# Altium PCB CS4334_V4.PcbDoc
Units mm, origin at the board's own origin, x right, y up, seen from the top; angles counter-clockwise.
Board outline 88.9 x 50.8 mm, 2 copper layers (Top Layer, Bottom Layer); 17 components, 12 nets, 65 pads, 4 vias.
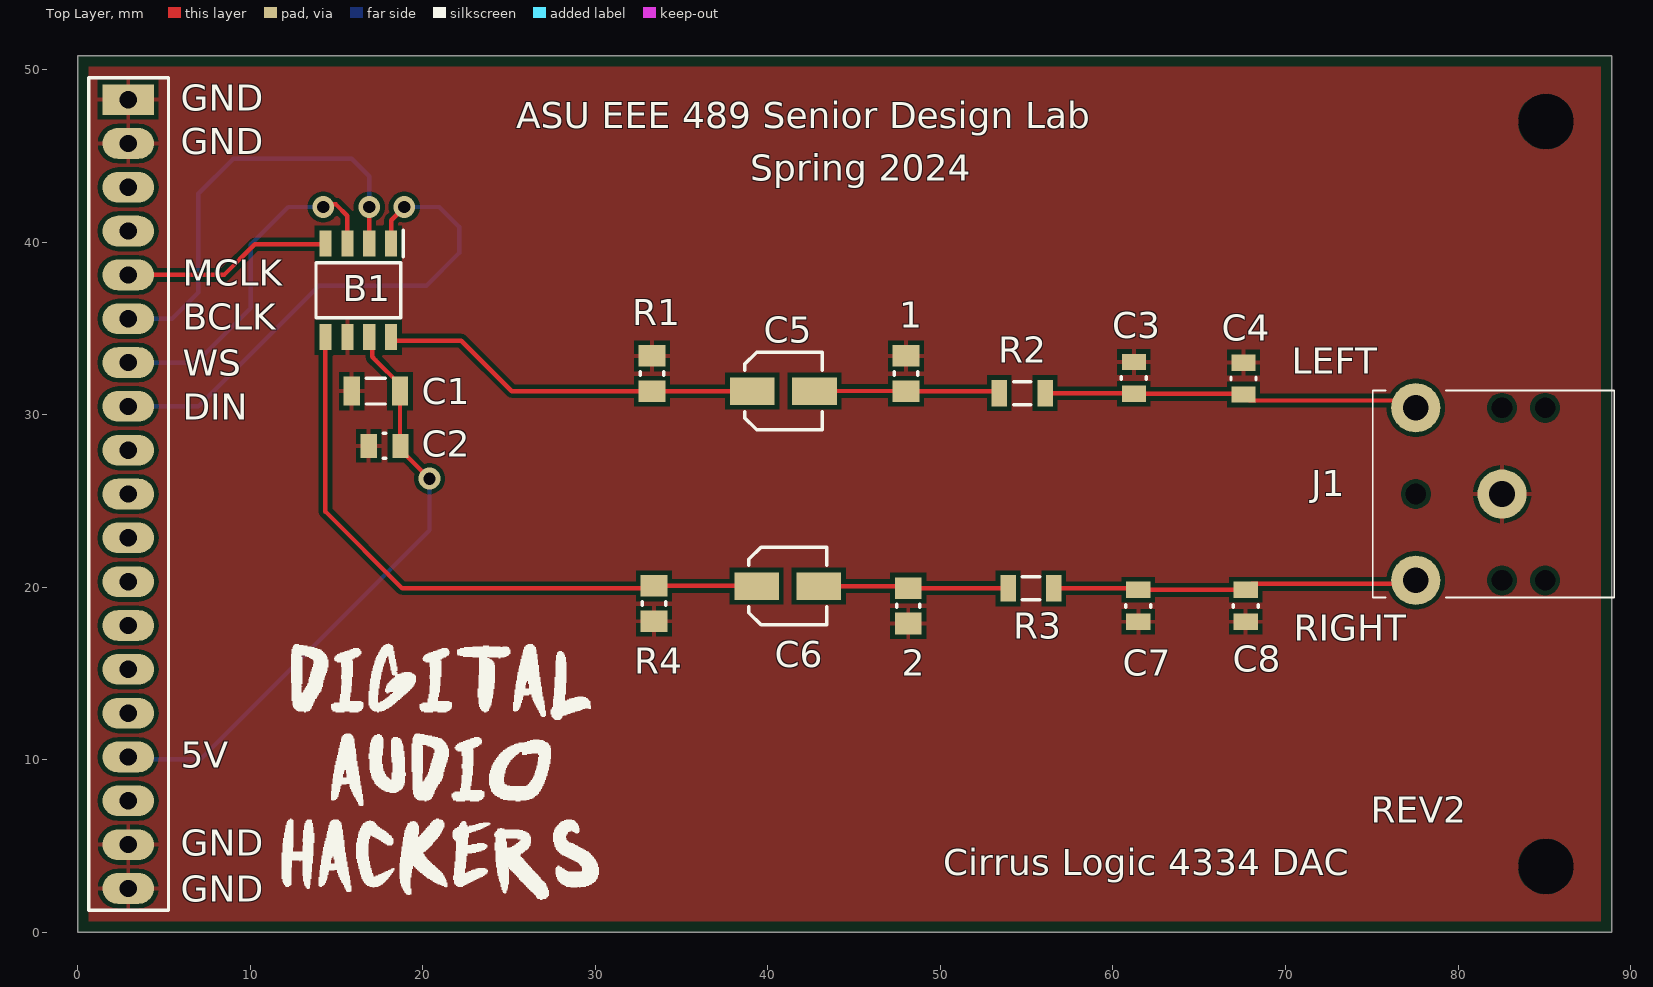
[diagram p0: Top Layer view]
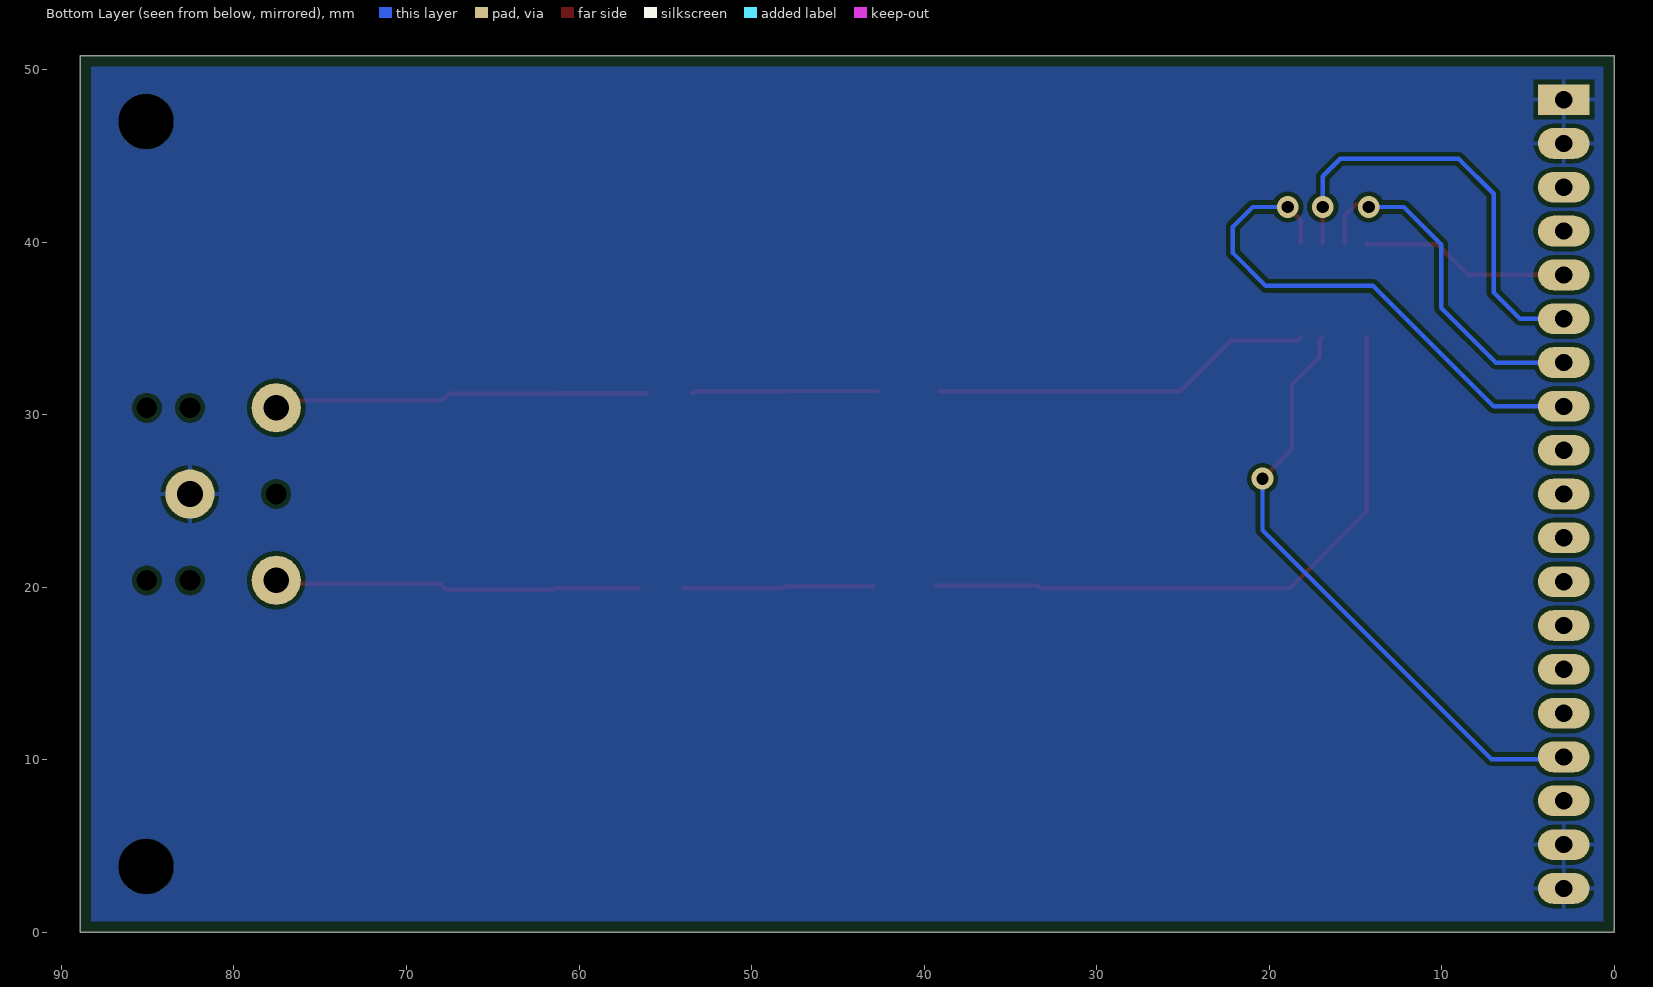
[diagram p1: Bottom Layer view, seen from below]

## Layer stack, top to bottom
Top Solder: solder mask 0.0102, Solder Resist, Dk 3.5
Top Layer: signal copper 0.0356
Dielectric 1: dielectric 0.32, FR-4, Dk 4.8
Bottom Layer: signal copper 0.0356
Bottom Solder: solder mask 0.0102, Solder Resist, Dk 3.5

## Board outline
0,0 88.9,0 88.9,50.8 0,50.8

## Design rules (kind name [scope] priority, off if disabled: settings)
Clearance [All] p1: gap=0.254 ignorepadtopadclearanceinfootprint=FALSE
HoleSize [All] p1: absolutevalues=TRUE maxlimit=4 minlimit=0.025 maxpercent=80.000 minpercent=20.000
MinimumSolderMaskSliver [All] p1: minsoldermaskwidth=0.245
PolygonConnect [All] p1: connectstyle=Relief reliefconductorwidth=0.254 reliefentries=4 polygonreliefangle="90 Angle" airgapwidth=0.254
RoutingVias [All] p1: holewidth=0.711 width=1.27 viastyle="Through Hole" minholewidth=0.711 minwidth=1.27 maxholewidth=0.711 maxwidth=1.27
SilkToSolderMaskClearance [IsPad] p1: minsilkscreentomaskgap=0.19 clearancetoexposedcopper=TRUE
SolderMaskExpansion [All] p1: expansion=0.102 istentingtop=FALSE
Width [All] p1: maxlimit=0.254 minlimit=0.254 preferedwidth=0.254
27 further rules are at their usual default settings.

## Components (designator, comment, footprint, x,y, rotation, side; value= is the part's Value field where it differs from the comment)
1 "CRCW080510K0FKEC" RESC2013X50X30ML20T20 48.006,32.385 r90 top
2 "CRCW080510K0FKEC" RESC2013X50X30ML20T20 48.133,18.923 r270 top
B1 "CS4334-KSZ" SOIC127P600X175-8N 16.256,37.211 r270 top
C1 "CAP 100nF 16V 1206(3216)" CAPC1206(3216)100_L 17.272,31.369 r0 top value=100nF
C2 "CC0805KKX7R7BB105" FP-CC0805-0_85-MFG 17.78,28.194 r180 top value="1 uF"
C3 "CC0805KRX7R9BB152" FP-CC0805-0_85-MFG 61.214,32.131 r90 top value="1.5 nF"
C4 "CC0805KRX7R9BB152" FP-CC0805-0_85-MFG 67.564,32.095 r90 top value="1.5 nF"
C5 "UUD1H3R3MCL1GS" NIC-CAPA2-4X5.8_V 40.894,31.369 r0 top
C6 "UUD1H3R3MCL1GS" NIC-CAPA2-4X5.8_V 41.148,20.066 r0 top
C7 "CC0805KRX7R9BB152" FP-CC0805-0_85-MFG 61.468,18.923 r270 top value="1.5 nF"
C8 "CC0805KRX7R9BB152" FP-CC0805-0_85-MFG 67.691,18.923 r270 top value="1.5 nF"
DC1 "DAUGHER_CARD" Daughter_Card 2.921,48.26 r0 top
J1 "SJ1-3523NG" SJ13523NG 82.55,25.4 r180 top
R1 "CRCW0805267KFKEA" RESC2013X50X30ML20T20 33.274,32.385 r270 top
R2 "ERJ8ENF5600V" RESC3216X70X50LL05T20 54.737,31.242 r0 top
R3 "ERJ8ENF5600V" RESC3216X70X50LL05T20 55.245,19.939 r0 top
R4 "CRCW0805267KFKEA" RESC2013X50X30ML20T20 33.401,19.05 r90 top

## Footprints (in the part's own frame and the unit in brackets; to place one, negate y for a bottom-side part, rotate by r counter-clockwise, add the part's x,y. Pads: shape width x height; smd on the part's side, far side on the other; paste and mask are expansions set on the pad)
CAPC1206(3216)100_L [mm] "Chip Capacitor, Body 3.2x1.6mm, Height 1mm, IPC High Density"
  rect 0.95x1.7 smd: 1(-1.4,0) 2(1.4,0)
  silkscreen extent -0.55,-0.75 0.55,0.75, body extent -1.7,-0.9 1.7,0.9, height 1
Daughter_Card [mm]
  rect 3x1.78 hole 1: 1(0,0)
  oval 3x1.78 hole 1: 2(0,-2.54) 3(0,-5.08) 4(0,-7.62) 5(0,-10.16) 6(0,-12.7) 7(0,-15.24) 8(0,-17.78) 9(0,-20.32) 10(0,-22.86) 11(0,-25.4) 12(0,-27.94) 13(0,-30.48) 14(0,-33.02) 15(0,-35.56) 16(0,-38.1) 17(0,-40.64) 18(0,-43.18) 19(0,-45.72)
  silkscreen extent -2.29,-46.99 2.33,1.27, body extent -2.92,-46.99 2.92,1.27, height 7.49
FP-CC0805-0_85-MFG [mm]
  rect 0.95x1.4 smd paste+0 mask+0: 1(-0.925,0) 2(0.925,0)
  silkscreen extent -0.08,-0.72 0.08,0.72, body extent -1.6,-1.05 1.6,1.05, height 0.25
NIC-CAPA2-4X5.8_V [mm] "Aluminum Electrolytic Capacitor, Diameter 4mm, Height 6.1mm, Pitch 3.6mm"
  rect 2.6x1.6 smd: 1(-1.8,0) 2(1.8,0)
  silkscreen extent -2.25,-2.25 2.25,2.25, body extent -2,-1.98 2,2, height 6.1
RESC2013X50X30ML20T20 [mm] "Chip Resistor, 2-Leads, Body 2.00x1.25mm, IPC Low Density"
  rect 1.25x1.55 smd: 1(-1.025,0) 2(1.025,0)
  silkscreen extent -0.1,-0.67 0.1,0.67, body extent -1.1,-0.72 1.1,0.72, height 0.5
RESC3216X70X50LL05T20 [mm] "Chip Resistor, 2-Leads, Body 3.20x1.60mm, IPC High Density"
  rect 0.9x1.55 smd: 1(-1.325,0) 2(1.325,0)
  silkscreen extent -0.5,-0.67 0.5,0.67, body extent -1.63,-0.82 1.62,0.82, height 0.7
SJ13523NG [mm]
  round 2.85 hole 1.5: 1(0,0) 2(5,-5) 3(5,5)
  round 0.6 hole 1.2 unplated: MH1(-2.5,5) MH2(0,5) MH3(-2.5,-5) MH4(0,-5) MH5(5,0)
  silkscreen extent -10.3,-6 7.5,6
SOIC127P600X175-8N [mm]
  rect 1.525x0.7 smd: 1(-2.712,1.905) 2(-2.712,0.635) 3(-2.712,-0.635) 4(-2.712,-1.905) 5(2.712,-1.905) 6(2.712,-0.635) 7(2.712,0.635) 8(2.712,1.905)
  silkscreen extent -3.47,-2.45 1.6,2.61

## Part data
1 2: library part CMP-1013-00623-2, Manufacturer="Vishay Dale", Part Number=CRCW080510K0FKEC
B1: "CS4334-KSZ, Audio DAC Dual 24 bit-, 96ksps +/-5%FSR Serial, 8-Pin SOIC", Manufacturer_Name="Cirrus Logic", Mouser Part Number=777-CS4334-KSZ, Datasheet Link=https://d3uzseaevmutz1.cloudfront.net/pubs/proDatasheet/CS4334-5-8-9_F7.pdf, Geometry.Height=1.75mm, Manufacturer_Part_Number=CS4334-KSZ, Mouser Price/Stock=https://www.mouser.co.uk/ProductDetail/Cirrus-Logic/CS4334-KSZ?qs=bUPhaerQQeGFS7Qn8B%252B25A%3D%3D
C1: library part CMP-1037-04182-1, "CAP 100nF 16V ±10% 1206 (3216 Metric) Thickness 1mm SMD", Case-EIA=1206, Case-Metric=3216, Rated Voltage="16 V", Tolerance=Â±10%, Max Thickness="1 mm", Technology=SMT
C2: library part CMP-03422-000001-1, "CAP CER 1UF 16V X7R 0805", Capacitance="1 uF", Manufacturer=Yageo, Package=CC0805-0.85, Temperature="-30°C to +85°C", Temperature Characteristic=X7R, Temperature Range High=+85°C, Temperature Range Low=-30°C, Tolerance=0.1, Voltage Rating="16 V", Automotive=No, Category=Cap, ComponentLink2Description=Datasheet, ComponentLink2URL=http://www.yageo.com/documents/recent/UPY-GPHC_Y5V_6.3V-to-50V_8.pdf, Device Class L1="Passive Components", Device Class L2=Capacitors, Device Class L3="Ceramic Capacitors", Digikey Description="CAP CER 1UF 16V X7R 0805", Footprint Url=http://www.yageo.com/exep/pages/download/literatures/UPY-C_GEN_24.pdf, Height=0.95mm, Ipc Land Pattern Name=CAPC200125X85, Lead Free=Yes, Manufacturer Part Number=CC0805KKX7R7BB105, Material=Ceramic, Mouser Description="Multilayer Ceramic Capacitors MLCC - SMD/SMT 1.0uF 16V X7R 10%", Octopart=https://octopart.com/cc0805kkx7r7bb105-yageo-8376555, RoHS=TRUE
C3 C4 C7 C8: library part CMP-1036-03122-2, "CAP CER 1500PF 50V X7R 0805", Capacitance="1.5 nF", Manufacturer=Yageo, Package=CC0805-0.85, Temperature="-30°C to +85°C", Temperature Characteristic=X7R, Temperature Range High=+85°C, Temperature Range Low=-30°C, Tolerance=0.1, Voltage Rating="50 V", Automotive=No, Category=Cap, ComponentLink2Description=Datasheet, ComponentLink2URL=http://www.yageo.com/documents/recent/UPY-GPHC_Y5V_6.3V-to-50V_8.pdf, Device Class L1="Passive Components", Device Class L2=Capacitors, Device Class L3="Ceramic Capacitors", Digikey Description="CAP CER 1500PF 50V X7R 0805", Footprint Url=http://www.yageo.com/exep/pages/download/literatures/UPY-C_GEN_24.pdf, Height=0.95mm, Ipc Land Pattern Name=CAPC200125X85, Lead Free=Yes, Manufacturer Part Number=CC0805KRX7R9BB152, Material=Ceramic, Mouser Description="Multilayer Ceramic Capacitors MLCC - SMD/SMT 1.5nF 50V X7R 10%", Octopart=https://octopart.com/cc0805krx7r9bb152-yageo-39467749, RoHS=TRUE
C5 C6: library part CMP-0687-00014-1, "Aluminum Electrolytic Capacitor, UD Series, Low Impedance, 3.3 uF, 50 V, + / - 20%, -55 to 105 degC, Chip Type, 4 x 5.8 mm D x L, Pb-Free, Reel", Manufacturer=Nichicon, Rated Capacitance="3.3 uF", Rated Ripple Current (at 100kHz)="30 mA", Rated Voltage="50 V", Tolerance Rated Capacitance="-20 to 20%", ComponentLink1Description="Manufacturer URL", ComponentLink1URL=http://www.nichicon.co.jp/, ComponentLink2Description=Datasheet, ComponentLink2URL=http://products.nichicon.co.jp/en/pdf/XJA043/e-ud.pdf, ComponentLink3Description="Package Specification", ComponentLink3URL=http://products.nichicon.co.jp/en/pdf/XJA043/e-ud.pdf, DatasheetVersion=08/2012, Diameter="4 mm", Endurance Time="2000 h", Impedance="5 Ohm", Length="5.8 mm", Mounting Technology="Surface Mount", PackageDescription="2-Pin Surface Mount Device, Diameter 4 mm, Height 5.8 mm, Pitch 3.6 mm", PackageReference=CAPAE-D4H5.8, Packing="Dia382mm Reel", PartNumber=UUD1H3R3MCL1GS, RoHS=TRUE
J1: "Phone Connectors Audio Jacks 3.5 MM AUDIO JACK", Manufacturer_Name="CUI Devices", Mouser Part Number=490-SJ1-3523NG, Datasheet Link=https://www.arrow.com/en/products/sj1-3523ng/cui-devices, Geometry.Height=5.6mm, Manufacturer_Part_Number=SJ1-3523NG, Mouser Price/Stock=https://www.mouser.co.uk/ProductDetail/CUI-Devices/SJ1-3523NG?qs=WyjlAZoYn50Li0c1bXCgGA%3D%3D
R1 R4: library part CMP-2001-03727-1, Manufacturer="Vishay Dale", Part Number=CRCW0805267KFKEA
R2 R3: library part CMP-2003-00856-1, Manufacturer=Panasonic, Part Number=ERJ8ENF5600V

## Free pads (board coordinates)
  round 0 hole 3.2 unplated: ""(85.09,3.81) ""(85.09,46.99)

## Via types
v1: diameter 1.27, hole 0.711, Top Layer to Bottom Layer, 4 vias

## Nets (pads, with @x,y where several pads share a name; then routed paths per layer and width w, separated by ;. In a path a pad name is that pad's centre, name@x,y a point inside that pad or via, vN(x,y) a via of type N, cw(c..) or ccw(c..) an arc to the next point about the centre after c; other vN are vias at no path point)
5V: B1.7 C1.2 C2.1 DC1.16 | length 35.7
  Top Layer w0.254: DC1.16 DC1.16@2.984,10.096 ; B1.7 17.064,34.326 17.064,33.355 17.272,33.147 17.272,33.144 18.672,31.744 C1.2 18.672,28.227 C2.1 18.705,27.969 v1(20.385,26.289)
  Bottom Layer w0.254: DC1.16 3.048,10.033 7.112,10.033 20.385,23.306 v1(20.385,26.289)
B: B1.2 DC1.6 | length 25.5
  Top Layer w0.254: B1.2 v1(16.891,42.037)
  Bottom Layer w0.254: DC1.6 5.461,35.56 6.985,37.084 6.985,42.799 9.017,44.831 15.875,44.831 16.891,43.815 v1(16.891,42.037)
Din: B1.1 DC1.8 | length 30.5
  Top Layer w0.254: B1.1 18.161,41.275 v1(18.923,42.037)
  Bottom Layer w0.254: DC1.8 6.985,30.48 13.97,37.465 20.193,37.465 22.098,39.37 22.098,40.894 20.955,42.037 v1(18.923,42.037)
GND: 1.2 2.2 B1.6 C1.1 C2.2 C3.2 C4.2 C7.2 C8.2 DC1.1 DC1.2 DC1.18 DC1.19 J1.1 pad. R1.1 R4.1
LEFT: B1.8 C5.1 R1.2 | length 22.2
  Top Layer w0.254: B1.8 18.37,34.29 22.225,34.29 25.155,31.36 R1.2 39.085,31.36 C5.1
M: B1.4 DC1.5 | length 12.2
  Top Layer w0.254: DC1.5 8.478,38.1 10.256,39.878 14.306,39.878 B1.4
Net1_1: 1.1 C5.2 R2.1 | length 10.8
  Top Layer w0.254: C5.2 47.997,31.369 1.1 53.294,31.36 R2.1
Net2_1: 2.1 C6.2 R3.1 | length 11
  Top Layer w0.254: C6.2 48.015,20.066 2.1 53.911,19.948 R3.1
NetC3_1: C3.1 C4.1 J1.2 R2.2 | length 21.9
  Top Layer w0.254: R2.2 61.178,31.242 C3.1 67.528,31.206 C4.1 67.912,30.822 77.128,30.822 J1.2 ; J1.2@77.503,29.591 J1.2@77.55,29.638
NetC7_1: C7.1 C8.1 J1.3 R3.2 | length 21.2
  Top Layer w0.254: R3.2 61.377,19.939 C7.1 C8.1 68.039,20.196 77.346,20.196 J1.3
RIGHT: B1.5 C6.1 R4.2 | length 37
  Top Layer w0.254: B1.5 14.351,24.384 18.796,19.939 33.265,19.939 R4.2 39.339,20.075 C6.1
WS: B1.3 DC1.7 | length 20.5
  Top Layer w0.254: v1(14.224,42.037) 14.373,42.186 14.964,42.186 15.621,41.529 B1.3
  Bottom Layer w0.254: DC1.7 6.858,33.02 10.033,36.195 10.033,39.878 12.192,42.037 v1(14.224,42.037)
pads on no net: DC1.3 DC1.4 DC1.9 DC1.10 DC1.11 DC1.12 DC1.13 DC1.14 DC1.15 DC1.17 J1.MH1 J1.MH2 J1.MH3 J1.MH4 J1.MH5

## Polygon pours and split planes (outlines as drawn)
GND on Top Layer "GND_L01_P000" (solid, pour order 0): 88.265,50.165 88.265,0.635 0.635,0.635 0.635,50.165
GND on Bottom Layer "GND_L02_P001" (solid, pour order 1): 88.265,50.165 88.265,0.635 0.635,0.635 0.635,50.165

## Silkscreen, mask and mechanical layers (free items; w line width, h text height)
Top Overlay:
  drawing of 19 lines, arcs and shapes, not listed
  text "GND" at 5.969,47.625 h1.52
  text "ASU EEE 489 Senior Design Lab" at 25.4,46.609 h1.52
  text "GND" at 5.969,45.085 h1.52
  text "Spring 2024" at 38.989,43.561 h1.52
  text "MCLK" at 6.096,37.465 h1.52
  text "BCLK" at 6.096,34.925 h1.52
  text "LEFT" at 70.358,32.385 h1.52
  text "WS" at 6.096,32.258 h1.52
  text "DIN" at 6.096,29.718 h1.52
  text "RIGHT" at 70.485,16.891 h1.52
  text "5V" at 5.969,9.525 h1.52
  text "REV2" at 74.93,6.35 h1.52
  text "GND" at 5.969,4.445 h1.52
  text "Cirrus Logic 4334 DAC" at 50.165,3.302 h1.52
  text "GND" at 5.969,1.778 h1.52
Mechanical 1:
  the board outline again, w0.254